# Altium PCB LAY-90818_A.brd.PcbDoc (part 6 of 6)
Units mil, origin at the board's own origin, x right, y up, seen from the top; angles counter-clockwise.
Board outline 4645.67 x 2165.35 mil, 4 copper layers (TOP, GND, POWER, BOTTOM), stack 60.45 mil thick; 414 components, 348 nets, 1441 pads, 720 vias.
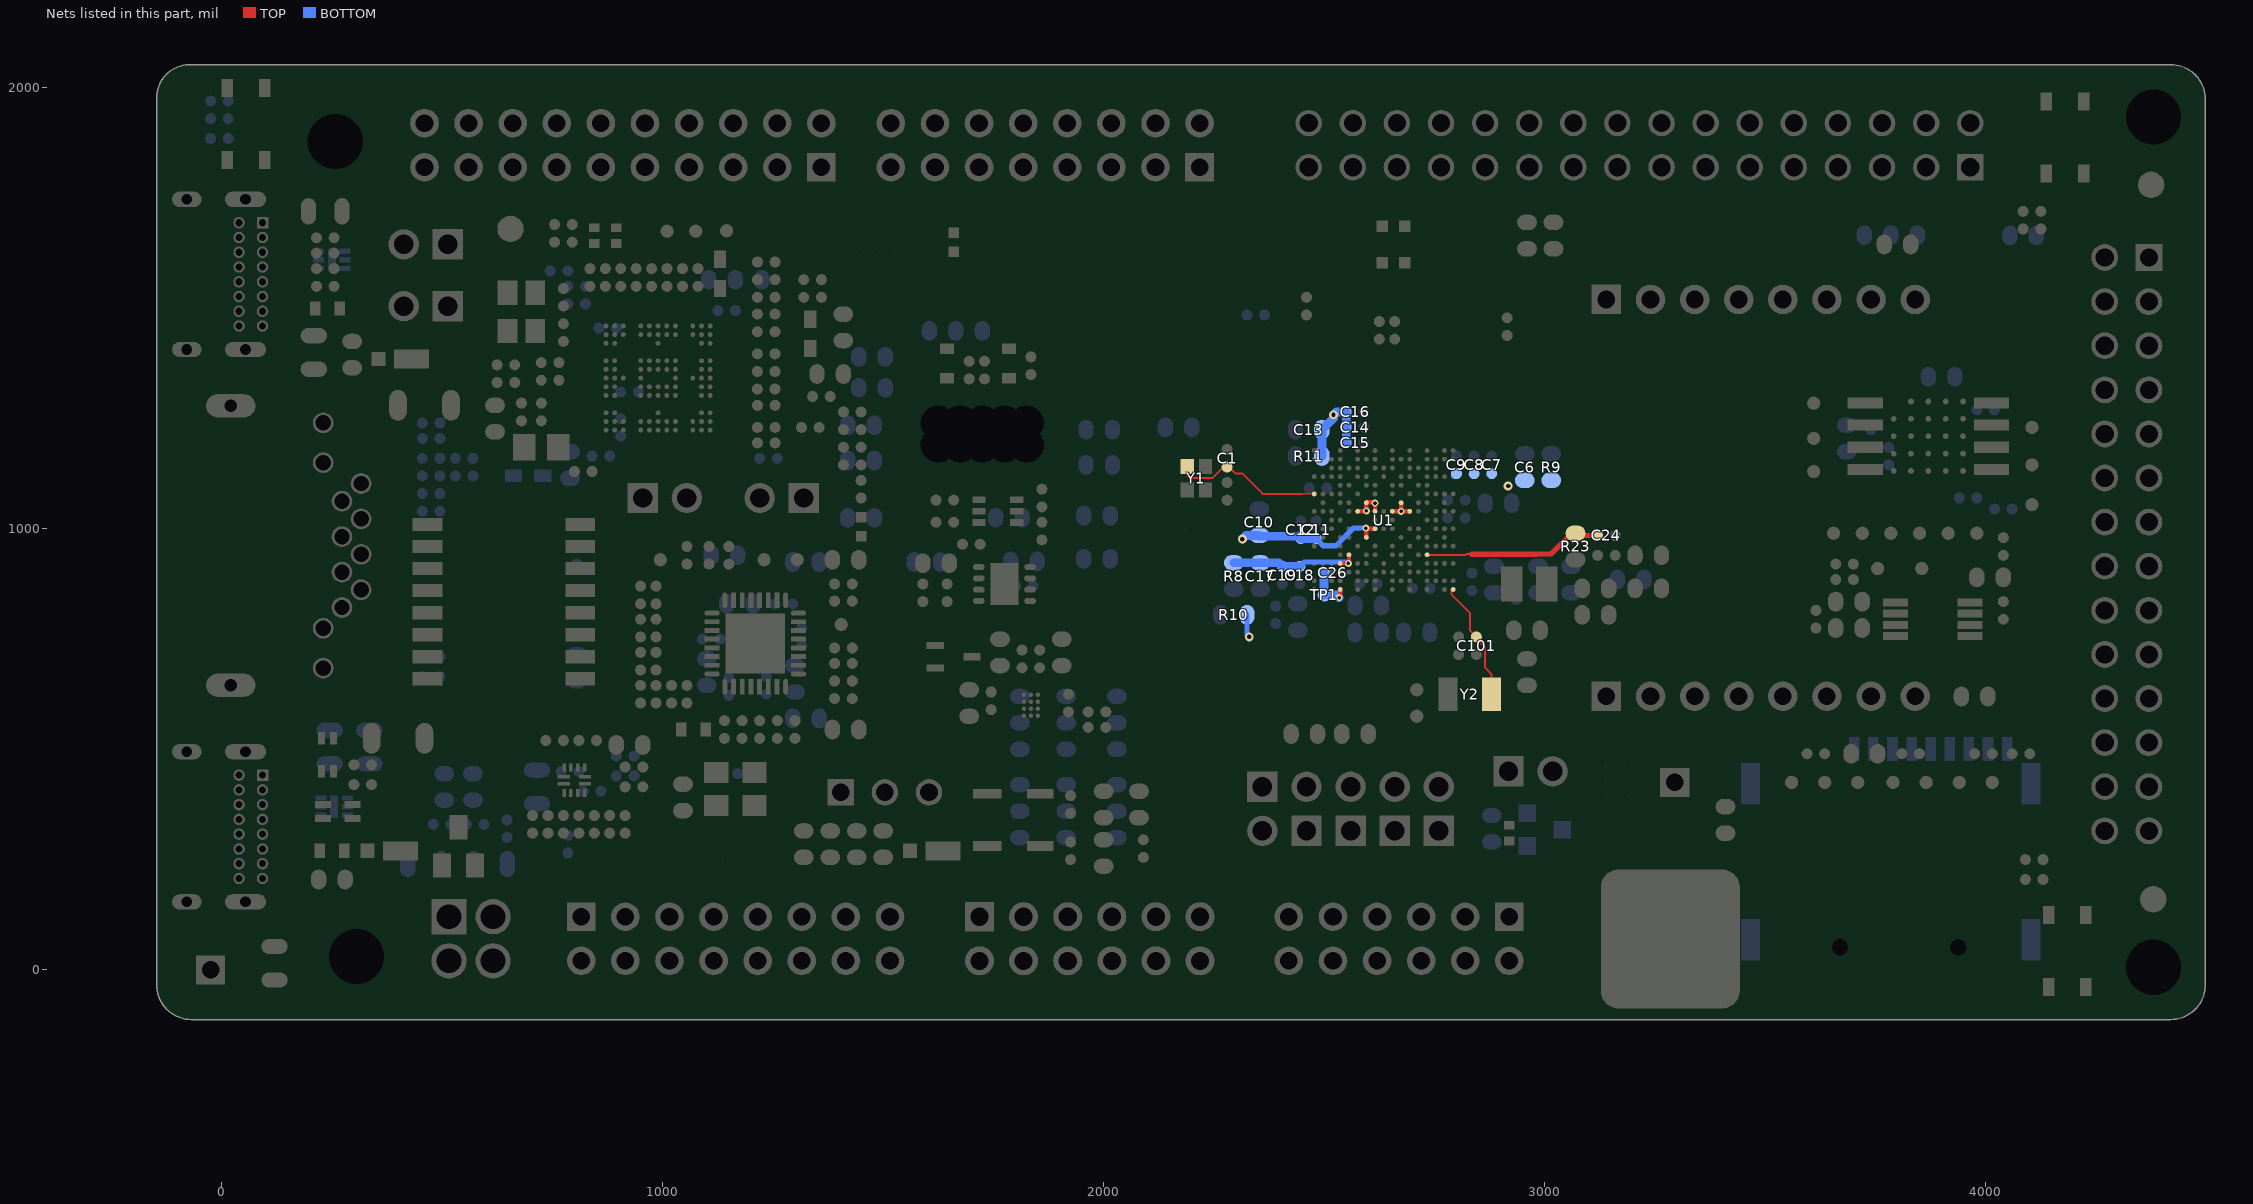
[diagram p8: the nets of this part, all layers, seen from the top]

## Via types
v1: diameter 20, hole 10, TOP to BOTTOM, 483 vias
v2: diameter 16, hole 8, TOP to BOTTOM, 215 vias
v3: diameter 18, hole 8, TOP to BOTTOM, 13 vias
v4: diameter 20, hole 10.1, TOP to BOTTOM, 9 vias

## Nets (pads, with @x,y where several pads share a name; then routed paths per layer and width w, separated by ;. In a path a pad name is that pad's centre, name@x,y a point inside that pad or via, vN(x,y) a via of type N, cw(c..) or ccw(c..) an arc to the next point about the centre after c; other vN are vias at no path point) (continued)
VDD_P0/1: C13.1 C14.1 C15.1 C16.1 R11.2 U1.G7 U1.H6 U1.H8 | length 283.9
  TOP w10: U1.H6@2575.94,1039.69 2590.32,1039.69 2591.5,1040.87 v2(2595.63,1040.87) U1.G7@2595.63,1059.37 2596.26,1060 2613.5,1060 v2(2615.31,1058.19) U1.H8@2615.31,1039.69
  BOTTOM w20: R11.2@2495,1165 C13.1@2495,1225 2521.16,1251.16 v1(2521.16,1258.79) 2527.37,1265 C16.1@2550,1265 C14.1@2550,1230 C15.1@2550,1195
VDD_P2: C10.1 C11.1 C12.1 R10.2 U1.K8 U1.L7 | length 405.2
  TOP w10: U1.L7@2595.63,980.63 2595.63,1000.59 v2(2594.38,1001.84) 2595.79,1001.84 2597.32,1000.31 U1.K8@2615.31,1000.31
  BOTTOM w12: R10.2@2325,805 2325,760 v1(2330,755) ; C11.1@2482,978 2498.62,961.38 2526.38,961.38 2566.84,1001.84 v2(2594.38,1001.84)
  BOTTOM w20: v1(2314.49,976.8) 2322.69,985 C10.1@2353,985 2354.97,983.03 2441.97,983.03 C12.1@2447,978 C11.1@2482,978
VDD_P3: C6.1 C7.1 C8.1 C9.1 R9.2 U1.G11 U1.H10 U1.H12 | length 59.2
  TOP w10: U1.H10@2654.69,1039.69 v2(2674.69,1039.69) ; U1.G11@2674.37,1059.37 2674.37,1040.01 v2(2674.69,1039.69) ; U1.H12@2694.06,1039.69 v2(2674.69,1039.69)
  other v1: 2917.16,1097.2
VDD_P4: C17.1 C18.1 C19.1 R8.2 U1.N5 U1.P4 | length 307.6
  TOP w10: U1.P4@2536.57,921.57 v2(2555.07,921.57) 2556.26,922.76 U1.N5@2556.26,941.26
  BOTTOM w12: C18.1@2445,915 2455,925 2551.64,925 v2(2555.07,921.57)
  BOTTOM w20: R8.2@2295,923 C17.1@2355,923 2397,923 C19.1@2405,915 C18.1@2445,915
VDD_SYS: C24.1 R23.2 U1.N14 | length 409.4
  TOP w4: U1.N14@2733.43,941.26 2734.12,940.57 2820.58,940.57 2822.51,942.5
  TOP w4.4: 2822.51,942.5 2835,942.5
  TOP w12: 2835,942.5 2982.5,942.5 2983.1,943.1 3014.61,943.1 3061.51,990 R23.2@3070,990 3075,985 C24.1@3120,985
VREFO: C26.1 TP1.1 U1.U4 | length 105.6
  TOP w10: v2(2533.8,844.23) 2536.57,847 U1.U4@2536.57,862.52
  BOTTOM w20: C26.1@2500,900 TP1.1@2500,850 2528.03,850 v2(2533.8,844.23)
XTAL: C1.1 U1.F1 Y1.1 | length 347.4
  TOP w4: 2449.15,1079.37 2477.21,1079.37 U1.F1@2477.52,1079.06
  TOP w4.4: Y1.1@2189.33,1141.58 2189.33,1120 2194.33,1115 2246.28,1115 2271.28,1140 C1.1@2280,1140 2285,1140 2300,1125 2315,1125 2360.63,1079.37 2449.15,1079.37
XTAL32K: C101.1 U1.U17 Y2.1 | length 276.7
  TOP w4.4: U1.U17@2792.48,862.52 2788.52,858.56 2788.52,851.48 2830.43,809.57 2830.43,769.57 C101.1@2845,755 2845,750 2865,730 2865,685 2879.21,670.79 Y2.1@2879.21,625
pads on no net: J2.19 J6.A8 J6.B8 J7. J17.A8 J17.B8 MH1.1 MH2.1 MH3.1 MH4.1 T1.4 T1.5 T1.12 T1.13 U2.3 U4.3 U4.4 U4.5 U7.A2 U7.A5 U7.B1 U7.B5 U9.4 U11.A1 U11.A2 U11.A6 U11.B3 U11.B7 U11.B8 U11.C1 U11.C2 U11.C7 U11.C12 U11.E1 U11.E5 U11.E13 U11.F6 U11.F13 U11.G3 U11.G5 U11.G6 U11.G8 U11.G9 U11.G11 U11.H6 U11.H8 U11.H13 U11.J1 U11.J2 U11.J5 U11.J7 U11.J8 U11.J9 U11.J12 U11.L2 U11.L7 U11.M2 U11.M7 U11.M8 U12.3 U12.4 U12.5

## Polygon pours and split planes (outlines as drawn)
MCU_LINK_3V3 on BOTTOM "BOTTOM-MCU_LINK_3V3" (solid, pour order 46): 1160,1525 1160,1200 1175,1200 1180,1195 1224.7,1195 1234.7,1205 1234.7,1241.9 1234.7,1299.7 1245,1310 1310,1310 1330,1330 1330,1530 1325,1535 1170,1535
VDD_IO_USB on BOTTOM "BOTTOM-VDD_IO_USB" (solid, pour order 41): 2675,510 2675,490 2610,425 2610,390 2595,375 2530,375 2520,385 2520,445 2370,595 2370,665 2375,670 2405,670 2550,525 2660,525
EPHY_VDDA on BOTTOM "BOTTOM-EPHY_VDDA" (solid, pour order 44): 790,675 845,675 863,657 863,619 877,605 900,605 995,700 995,785 1005,795 1070,795 1080,785 1080,769 1067,756 1067,678 1082,663 1117,663 1131,649 1131,590 1125,584 1014,584 975,545 805,545 780,570 780,665
N18262974 on BOTTOM "BOTTOM-N18262974" (solid, pour order 37): 270,565 -100,565 -110,555 -110,485 -100,475 90,475 140,525 275,525 275,560
P3V3 on BOTTOM "BOTTOM-P3V3" (solid, pour order 57): 775,160 775,75 795,55 1145,55 1165,35 1165,-50 1145,-70 705,-70 680,-45 680,280 690,290 775,290 800,265 800,185
P5-9V_VIN on BOTTOM "BOTTOM-P5-9V_VIN" (solid, pour order 55): 1365,430 1365,-10 1370,-15 1530,-15 1550,5 1550,215 1460,305 1460,430
MCU_LINK_VBAT on BOTTOM "BOTTOM-MCU_LINK_VBAT" (solid, pour order 26): 710,1135 855,1135 865,1145 865,1215 870,1220 920,1220 925,1215 925,1100 915,1090 715,1090 710,1095
P5V0 on BOTTOM "BOTTOM-P5V0" (solid, pour order 43): 1630,600 1705,600 1720,585 1720,285 1635,200 1560,200 1560,260 1630,330
VDD_P3 on BOTTOM "BOTTOM-VDD_P3" (solid, pour order 15): 2790,1135 2925,1135 2930,1130 3035,1130 3040,1125 3040,1090 3035,1085 2915,1085 2895,1105 2790,1105 2785,1110 2785,1130
P5V0_MCU_LINK_USB on BOTTOM "BOTTOM-P5V0_MCU_LINK_USB" (solid, pour order 25): 25,1480 113,1480 123,1470 280,1470 295,1485 295,1595 270,1595 270,1535 260,1525 120,1525 105,1510 25,1510 20,1505 20,1485
GND on BOTTOM "BOTTOM-GND" (solid, pour order 14): 2790,1155 2970,1155 2980,1165 2980,1205 2975,1210 2885,1210 2860,1185 2795,1185 2785,1175 2785,1160
GND_ENET on BOTTOM "BOTTOM-GND_ENET" (solid, pour order 23): 450,535 450,610 440,620 310,620 300,610 300,535 310,525 440,525
GND on BOTTOM "BOTTOM-GND 1" (solid, pour order 13): 755,1230 850,1230 855,1225 855,1160 850,1155 755,1155 750,1160 750,1225
GND on BOTTOM "BOTTOM-GND 2" (solid, pour order 32): 285,485 220,485 205,500 190,515 155,515 150,510 150,490 150,410 165,395 190,395 200,405 285,405 355,405 365,415 365,475 355,485
P3V3 on BOTTOM "BOTTOM-P3V3 1" (solid, pour order 1): 599,1090 676,1090 680,1094 680,1146 676,1150 599,1150 595,1146 595,1094
GND on TOP "TOP-GND" (solid, pour order 12): 444,485 536,485 540,489 540,556 536,560 444,560 440,556 440,489
P5V0 on TOP "TOP-P5V0" (solid, pour order 39): 1600,295 1885,295 1915,265 1965,265 1975,255 2013,255 2023,245 2023,224 2014,215 1605,215 1595,225 1595,290
N18292445 on TOP "TOP-N18292445" (solid, pour order 9): 877,1276 858.8,1276 839.7,1256.9 799.7,1256.9 769.7,1226.9 759.7,1216.9 734.7,1216.9 729.7,1211.9 729.7,1160 734.7,1155 795,1155 799.7,1159.7 799.7,1206.9 829.7,1236.9 839.7,1236.9 839.9,1237.1 844.2,1237.1 864,1256.9 877.6,1256.9 879.7,1259 879.7,1273.3
GND on TOP "TOP-GND 1" (solid, pour order 6): 164,1379 301,1379 311,1379 317,1373 317,1348 314,1345 305,1345 301,1341 155,1341 150,1346 150,1365
P5V0 on TOP "TOP-P5V0 1" (solid, pour order 45): 340,185 340,-30 360,-50 525,-50 545,-30 545,50 530,65 465,65 445,85 445,290 440,295 370,295 365,290 365,210 350,195
P5V_USB_HS on TOP "TOP-P5V_USB_HS" (solid, pour order 20): 275,325 345,325 350,320 350,210 320,180 270,180 265,185 265,315
P5V0_MCU_LINK_USB on TOP "TOP-P5V0_MCU_LINK_USB" (solid, pour order 0): 165,1470 220,1470 225,1475 225,1516 221,1520 164,1520 160,1516 160,1475
GND on TOP "TOP-GND 2" (solid, pour order 8): 570,1315 670,1315 685,1300 735,1300 738,1297 738,1279 732,1273 567,1273 560,1280 560,1305
GND_ENET on TOP "TOP-GND_ENET" (solid, pour order 5): 349,1240 416,1240 420,1244 420,1316 416,1320 349,1320 345,1316 345,1244
GND_ENET on TOP "TOP-GND_ENET 1" (solid, pour order 30): 95,630 360,630 365,625 365,590 360,585 360,575 360,535 360,495 355,490 295,490 290,495 290,570 270,590 95,590
P3V3 on TOP "TOP-P3V3" (solid, pour order 54): 2055,360 2115,360 2130,375 2130,505 2155,530 2380,530 2395,515 2395,385 2390,380 2330,380 2305,355 2305,305 2285,285 2050,285 2045,290 2045,350
N18256242 on TOP "TOP-N18256242" (solid, pour order 53): -105,1780 205,1780 215,1770 215,1715 215,1695 210,1690 185,1690 160,1715 -50,1715 -70,1695 -70,1455 -40,1425 145,1425 175,1455 237,1455 243,1449 243,1426 237,1420 191,1420 141,1370 -115,1370 -125,1380 -125,1770 -115,1780
DCDC_VDD_CORE on TOP "TOP-DCDC_VDD_CORE" (solid, pour order 18): 2980,915 2980,840 2985,835 3045,835 3055,825 3060,820 3060,800 3075,785 3095,785 3105,795 3105,890 3095,900 3050,900 3030,920 2985,920
DCDC_LX on TOP "TOP-DCDC_LX" (solid, pour order 16): 2790,930 2820,930 2830,920 2850,920 2945,920 2950,915 2950,840 2945,835 2870,835 2785,920 2785,925
N17976562 on TOP "TOP-N17976562" (solid, pour order 21): 2405,555 2405,390 2420,375 2480,375 2495,390 2495,455 2445,505 2445,555 2440,560 2410,560
P3V3_MCU on TOP "TOP-P3V3_MCU" (solid, pour order 58): 2475,560 2550,560 2555,555 2555,520 2585,490 2800,490 2805,485 2805,270 2750,215 2600,215 2535,280 2335,280 2325,290 2325,345 2335,355 2485,355 2505,375 2505,460 2465,500 2465,550
N18292448 on TOP "TOP-N18292448" (solid, pour order 28): 894.9,1308 845.8,1308 829.7,1291.9 771.9,1291.9 740,1260 665,1260 645,1240 604.7,1240 594.7,1230 594.7,1160 595,1160 600,1155 704.7,1155 709.7,1160 709.7,1215.7 720.9,1226.9 749.7,1226.9 759.7,1236.9 789.7,1266.9 834.7,1266.9 852.8,1285 887.8,1285 897,1294.2 897,1305.9
P5-9V_VIN on TOP "TOP-P5-9V_VIN" (solid, pour order 33): 1350,450 1453,450 1460,443 1460,305 1451,296 1306,296 1297,305 1297,322 1340,365 1340,440
N18262974 on TOP "TOP-N18262974" (solid, pour order 48): -115,535 115,535 130,520 130,485 120,475 -60,475 -80,455 -80,180 -70,170 155,170 165,160 165,110 165,45 155,35 95,35 90,40 90,100 80,110 -110,110 -125,125 -125,525
P5V_MCU_LINK_USB on TOP "TOP-P5V_MCU_LINK_USB" (solid, pour order 24): 260,1515 260,1410 265,1405 323,1405 329,1399 329,1369 333,1365 377.5,1365 377.5,1480.5 343,1515
P5V_HDR_IN on TOP "TOP-P5V_HDR_IN" (solid, pour order 38): 1475,435 1475,301 1479,297 1531,297 1538,290 1538,260 1543,255 1570,255 1580,265 1580,310 1588.5,318.5 1645.5,318.5 1657,330 1657,443 1650,450 1635,450 1490,450
USB_OTG_VBUS_5V on TOP "TOP-USB_OTG_VBUS_5V" (solid, pour order 10): 230,300 135,300 120,285 120,230 125,225 170,225 190,245 230,245 235,250 235,295
GND on TOP "TOP-GND 3" (solid, pour order 3): 80,-5 155,-5 160,-10 160,-70 155,-75 85,-75 75,-65 75,-10
GND on TOP "TOP-GND 4" (solid, pour order 11): 265,1690 330,1690 340,1700 340,1770 330,1780 265,1780 255,1770 255,1700
P5V0 on TOP "TOP-P5V0 2" (solid, pour order 19): 434,1360 551,1360 555,1364 555,1426 551,1430 434,1430 395,1430 390,1425 390,1365 395,1360
GND_ENET on TOP "TOP-GND_ENET 2" (solid, pour order 17): 285,1275 320,1240 350,1240 360,1250 360,1320 90,1320 85,1315 85,1295 90,1290 270,1290
P3V3 on TOP "TOP-P3V3 1" (solid, pour order 2): 1319.7,1461.9 1319.7,1456.9 1329.7,1446.9 1379.7,1446.9 1384.7,1451.9 1384.7,1461.9 1389.7,1466.9 1424.7,1466.9 1429.7,1471.9 1429.7,1501.9 1424.7,1506.9 1414.7,1506.9 1334.7,1506.9 1319.7,1491.9
MCU_LINK_3V3 on TOP "TOP-MCU_LINK_3V3" (solid, pour order 4): 1359.7,1386.9 1359.7,1326.9 1354.7,1321.9 1309.7,1321.9 1304.7,1326.9 1304.7,1386.9 1304.7,1416.9 1319.7,1431.9 1354.7,1431.9 1359.7,1426.9
GND on TOP "TOP-GND 5" (solid, pour order 35): 1712,372 1948,372 1960,360 2020,360 2031,349 2031,286 2020,275 1920,275 1890,305 1708,305 1703,310 1703,363
VDD_IO_USB on TOP "TOP-VDD_IO_USB" (solid, pour order 7): 2585,550 2585,505 2605,485 2670,485 2675,490 2675,545 2660,560 2595,560
GND on TOP "TOP-GND 6" (solid, pour order 29): 1255,270 1255,205 1525,205 1525,270
LDO_3V3 on TOP "TOP-LDO_3V3" (solid, pour order 31): 1835,450 2035,450 2095,450 2105,440 2105,390 2100,385 1825,385 1825,440
GND on POWER "POWER-GND" (solid, pour order 49): 115,465 295,465 305,455 305,205 290,190 130,190 115,205
VDD_P3 on POWER "POWER-VDD_P3" (solid, pour order 34): 2645,1050 2645,1015 2658,1002 2747,1002 2795,1050 2930,1050 2940,1060 2940,1105 2925,1120 2715,1120
N18566301 on POWER "POWER-N18566301" (solid, pour order 59): 2646,371 2786,371 2905,490 2905,616 2919,630 3074,630 3086,618 3086,374 2967,255 2655,255 2625,285 2625,350
VDD_CORE on POWER "POWER-VDD_CORE" (solid, pour order 47): 2655,995 2750,995 2795,1040 2960,1040 2970,1030 2970,965 3000,935 3125,935 3135,925 3135,880 3120,865 2938,865 2878,925 2756,925 2723,892 2705,892 2678,919 2671,919 2667,923 2645,945 2645,985
USB_OTG_VBUS_5V on POWER "POWER-USB_OTG_VBUS_5V" (solid, pour order 40): -15,425 85,425 85,310 101,294 185,294 195,284 195,225 190,220 -15,220 -30,235 -30,410
P3V3 on POWER "POWER-P3V3" (solid, pour order 63): 3397.5,-82.5 3385,-70 2030,-70 2015,-55 2015,230 1990,255 610,255 595,270 595,1295 610,1310 920,1310 940,1330 940,1555 910,1585 845,1585 820,1610 635,1610 505,1740 375,1740 330,1785 -7,1785 -17,1795 -17,2025 -7,2035 4160,2035 4445,1750 4445,220 4142.5,-82.5
VDD_DCDC on POWER "POWER-VDD_DCDC" (solid, pour order 22): 2770,890 2850,890 2950,790 2980,790 3010,820 3010,845 3000,855 2950,855 2865,940 2785,940 2765,920 2765,895
VDD_P2 on POWER "POWER-VDD_P2" (solid, pour order 42): 2290,995 2290,755 2300,745 2345,745 2375,775 2495,775 2500,780 2500,830 2360,970 2330,1000 2295,1000
VDD_IO_USB on POWER "POWER-VDD_IO_USB" (solid, pour order 60): 2377.5,1197.5 2375,1195 2375,1005 2603,777 2603,663 2525,585 2525,385 2530,380 2595,380 2615,400 2615,441 2705,531 2705,884 2677,912 2668,912 2570,1010 2549,1010 2490,1069 2490,1090 2490,1265 2510,1285 2545,1285 2650,1180 2960,1180 3020,1120 3035,1120 3070,1155 3070,1310 3030,1350 2425,1350 2377.5,1302.5
MCU_LINK_3V3 on POWER "POWER-MCU_LINK_3V3" (solid, pour order 27): 900,1495 890,1495 880,1485 880,1475 935,1420 935,1360 922,1347 807,1347 805,1345 805,1325 810,1320 930,1320 960,1350 960,1425 970,1435 1110,1435 1130,1415 1175,1415 1185,1425 1185,1440 1175,1450 1145,1450 1130,1465 930,1465
GND on POWER "POWER-GND 1" (solid, pour order 61): -5,1775 320,1775 365,1730 500,1730 630,1600 820,1600 845,1575 900,1575 925,1550 925,1365 915,1355 800,1355 770,1325 640,1325 545,1420 305,1420 285,1400 285,1360 275,1350 210,1350 0,1350 -20,1370 -20,1760
VDD_BAT on POWER "POWER-VDD_BAT" (solid, pour order 52): 2862,883 2738,883 2715,860 2715,525 2625,435 2625,397 2640,382 2693,382 2704,393 2704,429 2810,535 2810,695 2900,785 2900,845
VDD_CORE_SYS on POWER "POWER-VDD_CORE_SYS" (solid, pour order 56): 2736,381 2781,381 2895,495 2895,630 2911,646 3041,646 3195,800 3195,830 3185,840 3045,840 2985,780 2905,780 2815,690 2815,525 2726,436 2726,391
P5V0 on POWER "POWER-P5V0" (solid, pour order 62): 570,260 570,530 520,580 520,1095 553,1128 553,1397 535,1415 447,1415 315,1415 300,1400 300,1125 300,800 270,770 270,580 330,520 330,-20 350,-40 385,-75 1585,-75 1980,-75 2000,-55 2000,225 1985,240 590,240
N17976562 on POWER "POWER-N17976562" (solid, pour order 51): 2375,750 2375,517 2425,467 2425,396 2441,380 2500,380 2510,390 2510,590 2593,673 2593,745 2573,765 2390,765
VDD_P0/1 on POWER "POWER-VDD_P0/1" (solid, pour order 36): 2625,1050 2610,1035 2560,1035 2500,1095 2500,1275 2540,1275 2625,1190 2640,1175 2640,1118 2625,1103
VDD_LDO_CORE_IN on POWER "POWER-VDD_LDO_CORE_IN" (solid, pour order 50): 2575,1030 2605,1030 2645,1070 2645,1095 2720,1170 2955,1170 3030,1095 3030,1010 3045,995 3170,995 3275,890 3275,820 3265,810 3210,810 3205,815 3205,835 3190,850 3160,850 3140,870 3140,925 3125,940 3000,940 2975,965 2975,1080 2930,1125 2745,1125 2660,1040 2660,1010 2640,990 2595,990 2570,1015 2570,1025
GND on GND "GND-GND" (solid, pour order 64): 4301.38,2032.68 cw(c4301.38,1973.94) 4360.12,1973.94 4360.12,-33.94 cw(c4301.38,-33.94) 4301.38,-92.68 -68.7,-92.68 cw(c-68.7,-33.94) -127.44,-33.94 -127.44,630 160,630 162.5,632.5 302.5,632.5 320,650 320,815 345,840 345,1295 340,1300 180,1300 -122.44,1300 -127.44,1305 -127.44,1977.24 cw(c-71.94,1977.24) -74.72,2032.68

## Keep-outs
TOP:
  region: 720,1680 ccw(c655,1680) 655,1745 655,1723 656,1723 656,1710 cw(c656,1681) 685,1681 685,1680 cw(c655,1680) 655,1710 655,1722 654,1722 654,1745 ccw(c654.99,1680)
  region: 4445,160 ccw(c4380,160) 4380,225 4380,203 4381,203 4381,191 cw(c4379.98,161) 4410,161 4410,160 cw(c4380,160.98) 4380,191 4380,202 4379,202 4379,225 ccw(c4379.99,160)
  region: 4440,1780 ccw(c4375,1780) 4375,1845 4375,1823 4376,1823 4376,1810 cw(c4376.98,1781) 4406,1781 4406,1780 cw(c4375,1778.98) 4375,1810 4375,1822 4374,1822 4374,1845 ccw(c4374.99,1780)
Multi-Layer:
  region: 198.38,698.62 cw(c127.33,698.64) 63.88,666.65 -167.44,666.65 -167.44,1257.84 63.65,1257.84 cw(c127.57,1226.7) 198.38,1233.2
  region: 525,1051 525,585 530,580 740,580 745,585 745,1070 740,1075 549,1075

## Other copper
TOP:
  region net GND: 173.89,1554.16 173.34,1556.92 171.78,1559.25 169.44,1560.82 166.68,1561.37 163.92,1560.82 163.14,1560.29 161.58,1559.25 160.02,1556.92 159.47,1554.16 160.02,1551.4 161.58,1549.06 163.14,1548.02 163.92,1547.5 166.68,1546.95 169.44,1547.5 171.78,1549.06 173.34,1551.4 173.89,1554.16
  region net GND: 892.21,665 891.66,667.76 890.1,670.1 887.76,671.66 885,672.21 882.24,671.66 881.46,671.14 879.9,670.1 878.34,667.76 877.79,665 878.34,662.24 879.9,659.9 881.46,658.86 882.24,658.34 885,657.79 887.76,658.34 890.1,659.9 891.66,662.24 892.21,665
  region net GND: 892.21,1000 891.66,1002.76 890.1,1005.1 887.76,1006.66 885,1007.21 882.24,1006.66 881.46,1006.14 879.9,1005.1 878.34,1002.76 877.79,1000 878.34,997.24 879.9,994.9 881.46,993.86 882.24,993.34 885,992.79 887.76,993.34 890.1,994.9 891.66,997.24 892.21,1000
  region net GND: 173.89,1646.16 173.34,1648.92 171.78,1651.25 169.44,1652.82 166.68,1653.37 163.92,1652.82 163.14,1652.29 161.58,1651.25 160.02,1648.92 159.47,1646.16 160.02,1643.4 161.58,1641.06 163.14,1640.02 163.92,1639.5 166.68,1638.95 169.44,1639.5 171.78,1641.06 173.34,1643.4 173.89,1646.16
  region net GND: 422.21,800 421.66,802.76 420.1,805.1 417.76,806.66 415,807.21 412.24,806.66 411.46,806.14 409.9,805.1 408.34,802.76 407.79,800 408.34,797.24 409.9,794.9 411.46,793.86 412.24,793.34 415,792.79 417.76,793.34 420.1,794.9 421.66,797.24 422.21,800
  region net GND: 183.89,314.16 183.34,316.92 181.78,319.25 179.44,320.82 176.68,321.37 173.92,320.82 173.14,320.29 171.58,319.25 170.02,316.92 169.47,314.16 170.02,311.4 171.58,309.06 173.14,308.02 173.92,307.5 176.68,306.95 179.44,307.5 181.78,309.06 183.34,311.4 183.89,314.16
  region net GND: 422.21,890 421.66,892.76 420.1,895.1 417.76,896.66 415,897.21 412.24,896.66 411.46,896.14 409.9,895.1 408.34,892.76 407.79,890 408.34,887.24 409.9,884.9 411.46,883.86 412.24,883.34 415,882.79 417.76,883.34 420.1,884.9 421.66,887.24 422.21,890
  region net GND: 892.21,915 891.66,917.76 890.1,920.1 887.76,921.66 885,922.21 882.24,921.66 881.46,921.14 879.9,920.1 878.34,917.76 877.79,915 878.34,912.24 879.9,909.9 881.46,908.86 882.24,908.34 885,907.79 887.76,908.34 890.1,909.9 891.66,912.24 892.21,915
  region net GND: 422.21,1025 421.66,1027.76 420.1,1030.1 417.76,1031.66 415,1032.21 412.24,1031.66 411.46,1031.14 409.9,1030.1 408.34,1027.76 407.79,1025 408.34,1022.24 409.9,1019.9 411.46,1018.86 412.24,1018.34 415,1017.79 417.76,1018.34 420.1,1019.9 421.66,1022.24 422.21,1025
  region net GND: 892.21,745 891.66,747.76 890.1,750.1 887.76,751.66 885,752.21 882.24,751.66 881.46,751.14 879.9,750.1 878.34,747.76 877.79,745 878.34,742.24 879.9,739.9 881.46,738.86 882.24,738.34 885,737.79 887.76,738.34 890.1,739.9 891.66,742.24 892.21,745
  region net GND: 892.21,625 891.66,627.76 890.1,630.1 887.76,631.66 885,632.21 882.24,631.66 881.46,631.14 879.9,630.1 878.34,627.76 877.79,625 878.34,622.24 879.9,619.9 881.46,618.86 882.24,618.34 885,617.79 887.76,618.34 890.1,619.9 891.66,622.24 892.21,625
  text "04" at 3689,-1511 h60
  text "L1_PS" at 4239,-1511 h60
GND:
  text "L2_GND" at 4245,-1505 h60
  text "05" at 3720,-1520 h60
POWER:
  text "L3_POWER" at 4220,-1510 h60
  text "06" at 3710,-1515 h60
BOTTOM:
  text "170-90818 REV A" at 3460,-70 h25
  text "07" at 3694,-1511 h60
  text "L4_SS" at 4234,-1511 h60

## Silkscreen, mask and mechanical layers (free items; w line width, h text height)
Top Overlay:
  circle w8: c1900,1626 r39
  circle w8: c1900,1626 r39
  lines w6: -50,1360 -50,1325 15,1325 ; -44,1779 -44,1790 29,1790 325,1790 325,1720 590,1720 ; -20,1325 560,1325 560,1120 775,1120 775,1105 860,1105 860,995 955,995 ; 730,1715 1385,1715 ; 1120,230 1120,325 1265,325 1265,495 ; 1120,570 1120,495 1330,495 1330,595 1320,595 ; 1145,995 1400,995 1400,960 1480,960 1480,980 ; 1175,595 1275,595 ; 1365,650 1365,585 1565,585 1565,845 1465,845 1465,895 1365,895 1365,840 ; 1365,690 1365,780 ; 1380,1715 1495,1715 1495,1040 ; 1385,180 1385,230 925,230 925,180 1475,180 ; 2864.96,1049.89 2904.96,1049.89 ; 2930,1695 2920,1695 2920,1750 2920,2040 3815,2040 3815,1695 3050,1695 ; 2944.96,1009.89 2904.96,1009.89 ; 2944.96,1089.89 2904.96,1089.89 2949.96,1089.89 ; 2944.96,1169.89 2904.96,1169.89 ; 2904.96,1009.89 2904.96,1169.89 ; 2904.96,1009.89 2949.96,1009.89 ; 2904.96,1169.89 2949.96,1169.89 ; 2949.96,1009.89 cw(c2944.96,1009.89) 2944.96,1004.89 cw(c2944.96,1009.89) 2939.96,1009.89 cw(c2944.96,1009.89) 2944.96,1014.89 cw(c2944.96,1009.89) 2949.96,1009.89 ; 2949.96,1089.89 cw(c2944.96,1089.89) 2944.96,1084.89 cw(c2944.96,1089.89) 2939.96,1089.89 cw(c2944.96,1089.89) 2944.96,1094.89 cw(c2944.96,1089.89) 2949.96,1089.89 ; 2949.96,1169.89 cw(c2944.96,1169.89) 2944.96,1164.89 cw(c2944.96,1169.89) 2939.96,1169.89 cw(c2944.96,1169.89) 2944.96,1174.89 cw(c2944.96,1169.89) 2949.96,1169.89 ; 2854.96,1049.89 cw(c2864.96,1049.89) 2864.96,1059.89 cw(c2864.96,1049.89) 2874.96,1049.89 cw(c2864.96,1049.89) 2864.96,1039.89 cw(c2864.96,1049.89) 2854.96,1049.89 ; 2854.96,1129.89 cw(c2864.96,1129.89) 2864.96,1139.89 cw(c2864.96,1129.89) 2874.96,1129.89 cw(c2864.96,1129.89) 2864.96,1119.89 cw(c2864.96,1129.89) 2854.96,1129.89 ; 2859.96,1049.89 cw(c2864.96,1049.89) 2864.96,1054.89 cw(c2864.96,1049.89) 2869.96,1049.89 cw(c2864.96,1049.89) 2864.96,1044.89 cw(c2864.96,1049.89) 2859.96,1049.89 ; 2859.96,1129.89 cw(c2864.96,1129.89) 2864.96,1134.89 cw(c2864.96,1129.89) 2869.96,1129.89 cw(c2864.96,1129.89) 2864.96,1124.89 cw(c2864.96,1129.89) 2859.96,1129.89 ; 2864.96,1129.89 2904.96,1129.89 2864.96,1129.89 ; 2934.96,1009.89 ccw(c2944.96,1009.89) 2944.96,999.89 ccw(c2944.96,1009.89) 2954.96,1009.89 ccw(c2944.96,1009.89) 2944.96,1019.89 ccw(c2944.96,1009.89) 2934.96,1009.89 ; 2934.96,1089.89 ccw(c2944.96,1089.89) 2944.96,1079.89 ccw(c2944.96,1089.89) 2954.96,1089.89 ccw(c2944.96,1089.89) 2944.96,1099.89 ccw(c2944.96,1089.89) 2934.96,1089.89 ; 2934.96,1169.89 ccw(c2944.96,1169.89) 2944.96,1159.89 ccw(c2944.96,1169.89) 2954.96,1169.89 ccw(c2944.96,1169.89) 2944.96,1179.89 ccw(c2944.96,1169.89) 2934.96,1169.89
  lines w8: 2920.04,542.58 ccw(c2978.62,589.28) 2977.91,514.37 ; 2922.01,1578.58 cw(c2978.58,1529.44) 2978.57,1604.37 4002.43,1604.37 ; 2977.95,514.35 3200.09,514.35 3670,514.35 ; 3780,514.35 4000.09,514.35 ; 3998.64,514.37 ccw(c3998.64,574.72) 4041.32,532.05 ; 4002.43,1604.39 cw(c4002.43,1553.18) 4038.64,1589.39 ; 4045.96,1582.07 cw(c4003.29,1539.39) 4063.64,1539.39 4063.64,1505 4063.64,975 4063.64,915 ; 4048.64,539.37 ccw(c4012.43,575.58) 4063.64,575.58 4063.64,865 ; 1915,1641 ccw(c1900,1625) 1920,1616 cw(c1900,1625) 1915,1641
Bottom Overlay:
  lines w6: 3170.04,1050.04 3170.04,1365 3485,1365 3485,1050.04 3170.04,1050.04
  lines w8: 2433,1469 ccw(c2426,1445) 2426,1470 cw(c2426,1445) 2433,1469 ; 2433,1469 ccw(c2440.2,1493.69) 2439,1468 ; 2433,1469 ccw(c2440.2,1493.69) 2439,1468 ; 2437,1427 ccw(c2413,1406.32) 2413,1438 cw(c2413,1406.32) 2437,1427 ; 2437,1427 ccw(c2460.31,1447.11) 2444,1421 ; 2437,1427 ccw(c2460.31,1447.11) 2444,1421 ; 2439,1468 ccw(c2446.5,1628.61) 2454,1468 ; 2439,1468 ccw(c2446.5,1628.61) 2454,1468 ; 2444,1421 2480,1409 ; 2444,1421 2480,1409 ; 2454,1468 ccw(c2448.71,1581.19) 2479,1472 ; 2454,1468 ccw(c2448.71,1581.19) 2479,1472 ; 2479,1472 cw(c2490.68,1429.9) 2518,1464 ; 2479,1472 cw(c2490.68,1429.9) 2518,1464 ; 2480,1409 cw(c2480,1383.98) 2505,1385 ; 2480,1409 cw(c2480,1383.98) 2505,1385 ; 2505,1385 ccw(c2510.72,1387.17) 2514,1382 ; 2505,1385 ccw(c2510.72,1387.17) 2514,1382 ; 2507,1411 cw(c2339.38,1286.21) 2514,1401 ; 2507,1411 ccw(c2482.41,1392.68) 2487,1423 cw(c2482.41,1392.68) 2507,1411 ; 2507,1411 cw(c2339.38,1286.21) 2514,1401 ; 2514,1382 2515,1384 ; 2514,1382 2515,1384 ; 2514,1401 cw(c2499.7,1391.63) 2515,1384 ; 2514,1401 cw(c2499.7,1391.63) 2515,1384 ; 2518,1464 cw(c2508.13,1451.66) 2523,1457 ; 2518,1464 cw(c2508.13,1451.66) 2523,1457 ; 2523,1425 ccw(c2530.07,1435.42) 2528,1423 ; 2523,1425 cw(c2678.46,1652.72) 2508,1436 ccw(c2678.46,1652.72) 2523,1425 ; 2523,1425 ccw(c2530.07,1435.42) 2528,1423 ; 2523,1457 ccw(c2536.58,1461.82) 2530,1449 ; 2523,1457 ccw(c2536.58,1461.82) 2530,1449 ; 2528,1423 2534,1422 ; 2528,1423 2534,1422 ; 2529,1386 ccw(c2533.5,1383.67) 2537,1380 ; 2529,1386 ccw(c2533.5,1383.67) 2537,1380 ; 2529,1386 2532,1392 ; 2529,1386 2532,1392 ; 2530,1406 cw(c2545.11,1408.17) 2531,1414 ; 2530,1406 cw(c2545.11,1408.17) 2531,1414 ; 2530,1406 2532,1392 ; 2530,1406 2532,1392 ; 2530,1449 2535,1445 ; 2530,1449 2535,1445 ; 2531,1414 ccw(c2395,1469.56) 2534,1422 ; 2531,1414 ccw(c2395,1469.56) 2534,1422 ; 2535,1445 2541,1440 ; 2535,1445 2541,1440 ; 2537,1380 ccw(c2519.86,1397) 2544,1397 ; 2537,1380 ccw(c2519.86,1397) 2544,1397 ; 2541,1440 cw(c2530.1,1426.92) 2547,1429 ; 2541,1440 cw(c2530.1,1426.92) 2547,1429 ; 2544,1397 2544,1410 ; 2544,1397 2544,1410 ; 2544,1410 2545,1418 ; 2544,1410 2545,1418 ; 2545,1418 2546,1424 ; 2545,1418 2546,1424 ; 2546,1424 2547,1428 ; 2546,1424 2547,1428 ; 2547,1428 2547,1429 ; 2547,1428 2547,1429
  lines w10: 2362,1345 2610,1345 2362,1345 ; 2362,1345 2485,1594 ; 2362,1345 2485,1594 ; 2485,1594 2611,1345 2485,1594 ; 2359,1345 2549,1467 2359,1345
CUTOUT:
  the board outline again, w1
DIMENSION:
  lines w1: -826.5,-62.5 -780,-62.5 -826.5,-62.5 ; -826.5,-62.5 -826.5,62.5 ; -826.5,-62.5 -826.5,62.5 ; -826.5,62.5 -780,62.5 -826.5,62.5 ; -685,-575 -25,0 ; -685,-575 -2720,-575 -685,-575 ; -685,-575 -25,0 ; -547.5,-62.5 -594,-62.5 -547.5,-62.5 ; -547.5,-62.5 -547.5,62.5 ; -547.5,-62.5 -547.5,62.5 ; -547.5,62.5 -594,62.5 -547.5,62.5 ; -154.52,-79.68 -25,0 ; -154.52,-79.68 -121.68,-117.38 ; -154.52,-79.68 -25,0 ; -154.52,-79.68 -121.68,-117.38 ; -147.44,2385 2.56,2410 ; -147.44,2385 2.56,2360 ; -147.44,2385 2.56,2410 ; -147.44,2385 2.56,2360 ; -147.44,2385 1161.75,2385 -147.44,2385 ; -147.07,1006.03 5,1005 ; -147.07,1006.03 -138.51,1055.29 ; -147.07,1006.03 5,1005 ; -147.07,1006.03 -138.51,1055.29 ; -138.51,1055.29 5,1005 ; -138.51,1055.29 5,1005 ; -121.68,-117.38 -25,0 ; -121.68,-117.38 -25,0 ; -87.5,-531.5 37.5,-531.5 ; -87.5,-531.5 -87.5,-485 -87.5,-531.5 ; -87.5,-531.5 37.5,-531.5 ; -87.5,-252.5 37.5,-252.5 ; -87.5,-252.5 -87.5,-299 -87.5,-252.5 ; -87.5,-252.5 37.5,-252.5 ; 2.56,2360 2.56,2410 ; 2.56,2360 2.56,2410 ; 5,1005 -830,1150 5,1005 ; 37.5,-531.5 37.5,-485 37.5,-531.5 ; 37.5,-252.5 37.5,-299 37.5,-252.5 ; 2255.5,2322.5 2302,2322.5 2255.5,2322.5 ; 2255.5,2322.5 2255.5,2447.5 ; 2255.5,2322.5 2255.5,2447.5 ; 2255.5,2447.5 2302,2447.5 2255.5,2447.5 ; 3154.5,2322.5 3108,2322.5 3154.5,2322.5 ; 3154.5,2322.5 3154.5,2447.5 ; 3154.5,2322.5 3154.5,2447.5 ; 3154.5,2447.5 3108,2447.5 3154.5,2447.5 ; 4080,765 5200,-845 ; 4080,765 5200,-845 ; 4080,765 4186.18,656.14 ; 4080,765 4145.14,627.59 ; 4080,765 4186.18,656.14 ; 4080,765 4145.14,627.59 ; 4145.14,627.59 4186.18,656.14 ; 4145.14,627.59 4186.18,656.14 ; 4348.23,2360 4498.23,2385 ; 4348.23,2360 4348.23,2410 ; 4348.23,2360 4498.23,2385 ; 4348.23,2360 4348.23,2410 ; 4348.23,2410 4498.23,2385 ; 4348.23,2410 4498.23,2385 ; 4498.23,2385 3248.25,2385 4498.23,2385 ; 5200,-845 6530,-855 5200,-845 ; 5507.5,1062.5 5632.5,1062.5 ; 5507.5,1062.5 5507.5,1109 5507.5,1062.5 ; 5507.5,1062.5 5632.5,1062.5 ; 5507.5,1837.5 5632.5,1837.5 ; 5507.5,1837.5 5507.5,1791 5507.5,1837.5 ; 5507.5,1837.5 5632.5,1837.5 ; 5545,37.32 5570,-112.68 ; 5545,37.32 5595,37.32 ; 5545,37.32 5570,-112.68 ; 5545,37.32 5595,37.32 ; 5545,1902.68 5570,2052.68 ; 5545,1902.68 5595,1902.68 ; 5545,1902.68 5570,2052.68 ; 5545,1902.68 5595,1902.68 ; 5570,-112.68 5570,-31.25 5570,-112.68 ; 5570,-112.68 5595,37.32 ; 5570,-112.68 5595,37.32 ; 5570,2052.68 5570,1931.25 5570,2052.68 ; 5570,2052.68 5595,1902.68 ; 5570,2052.68 5595,1902.68 ; 5632.5,1062.5 5632.5,1109 5632.5,1062.5 ; 5632.5,1837.5 5632.5,1791 5632.5,1837.5 ; -453.75,0 -125,0 -453.75,0 ; -147.44,2077.24 -147.44,2485 -147.44,2077.24 ; -25,-158.75 -25,-100 -25,-158.75 ; 4481.69,2052.68 5670,2052.68 4481.69,2052.68 ; 4498.23,2073.94 4498.23,2485 4498.23,2073.94 ; 4519.49,-112.68 5670,-112.68 4519.49,-112.68
NCLEGEND-1-4:
  circle w1: c11339.5,7390 r60
  circle w1: c11339.5,7640 r60
  circle w1: c11339.5,6140 r60
  circle w1: c11339.5,7140 r60
  lines w1: 10890,4265 17865,4265 ; 10890,4515 17865,4515 ; 10890,4765 17865,4765 ; 10890,5015 17865,5015 ; 10890,5265 17865,5265 ; 10890,5515 17865,5515 ; 10890,5765 17865,5765 ; 10890,6015 17865,6015 ; 10890,6265 17865,6265 ; 10890,6515 17865,6515 ; 10890,6765 17865,6765 ; 10890,7015 17865,7015 ; 10890,7265 17865,7265 ; 10890,7515 17865,7515 ; 10890,7765 17865,7765 ; 10890,8015 17865,8015 ; 10890,8265 17865,8265 ; 11789,4015 11789,8015 ; 13804,4015 13804,8015 ; 15819,4015 15819,8015 ; 17090,4015 17090,8015 ; 10890,4015 10890,8515 17865,8515 17865,4015 10890,4015 ; 11192,4270 ccw(c11192,4390) 11192,4510 11487,4510 ccw(c11487,4390) 11487,4270 11192,4270 ; 11209.61,6640 11247.66,6548.16 11339.5,6510.11 11431.34,6548.16 11469.39,6640 11431.34,6731.84 11339.5,6769.89 11247.66,6731.84 11209.61,6640 ; 11213.07,4020 ccw(c11213.07,4140) 11213.07,4260 11465.93,4260 ccw(c11465.93,4140) 11465.93,4020 11213.07,4020 ; 11262,4520 ccw(c11262,4640) 11262,4760 11417,4760 ccw(c11417,4640) 11417,4520 11262,4520 ; 11279.5,4890 11339.5,4950 11399.5,4890 11339.5,4830 11279.5,4890 ; 11279.5,5390 11309.5,5330 11369.5,5330 11399.5,5390 11369.5,5450 11309.5,5450 11279.5,5390 ; 11279.5,5580 11399.5,5580 11399.5,5700 11279.5,5700 11279.5,5580 ; 11279.5,6390 11309.5,6330 11369.5,6330 11399.5,6390 11369.5,6450 11309.5,6450 11279.5,6390 ; 11279.5,6890 11309.5,6830 11369.5,6830 11399.5,6890 11369.5,6950 11309.5,6950 11279.5,6890 ; 11299.5,5830 11299.5,5950 11379.5,5950 11379.5,5830 11299.5,5830 ; 11309.5,5020 ccw(c11309.5,5140) 11309.5,5260 11369.5,5260 ccw(c11369.5,5140) 11369.5,5020 11309.5,5020
  text "DRILL CHART: TOP to BOTTOM" at 13077.5,8327.5 h125
  text "ALL UNITS ARE IN MILS" at 13327.5,8077.5 h125
  text "FIGURE" at 11039.5,7827.5 h125
  text "FINISHED_SIZE" at 12146.5,7827.5 h125
  text "TOLERANCE_DRILL" at 14061.5,7827.5 h125
  text "PLATED" at 16154.5,7827.5 h125
  text "QTY" at 17327.5,7827.5 h125
  text "8.0" at 12646.5,7577.5 h125
  text "+0.0/-8.0" at 14361.5,7577.5 h125
  text "PLATED" at 16154.5,7577.5 h125
  text "228" at 17327.5,7577.5 h125
  text "10.0" at 12596.5,7327.5 h125
  text "+0.0/-10.0" at 14311.5,7327.5 h125
  text "PLATED" at 16154.5,7327.5 h125
  text "483" at 17327.5,7327.5 h125
  text "10.1" at 12596.5,7077.5 h125
  text "+0.0/-10.1" at 14311.5,7077.5 h125
  text "PLATED" at 16154.5,7077.5 h125
  text "9" at 17427.5,7077.5 h125
  text "16.0" at 12596.5,6827.5 h125
  text "+2.0/-2.0" at 14361.5,6827.5 h125
  text "PLATED" at 16154.5,6827.5 h125
  text "32" at 17377.5,6827.5 h125
  text "28.0" at 12596.5,6577.5 h125
  text "+2.0/-2.0" at 14361.5,6577.5 h125
  text "PLATED" at 16154.5,6577.5 h125
  text "10" at 17377.5,6577.5 h125
  text "35.0" at 12596.5,6327.5 h125
  text "+3.0/-3.0" at 14361.5,6327.5 h125
  text "PLATED" at 16154.5,6327.5 h125
  text "12" at 17377.5,6327.5 h125
  text "40.0" at 12596.5,6077.5 h125
  text "+3.0/-3.0" at 14361.5,6077.5 h125
  text "PLATED" at 16154.5,6077.5 h125
  text "85" at 17377.5,6077.5 h125
  text "41.0" at 12596.5,5827.5 h125
  text "+3.0/-3.0" at 14361.5,5827.5 h125
  text "PLATED" at 16154.5,5827.5 h125
  text "72" at 17377.5,5827.5 h125
  text "44.0" at 12596.5,5577.5 h125
  text "+2.0/-2.0" at 14361.5,5577.5 h125
  text "PLATED" at 16154.5,5577.5 h125
  text "20" at 17377.5,5577.5 h125
  text "56.0" at 12596.5,5327.5 h125
  text "+3.0/-3.0" at 14361.5,5327.5 h125
  text "PLATED" at 16154.5,5327.5 h125
  text "4" at 17427.5,5327.5 h125
  text "37.0" at 12596.5,5077.5 h125
  text "+2.0/-2.0" at 14361.5,5077.5 h125
  text "NON-PLATED" at 15954.5,5077.5 h125
  text "2" at 17427.5,5077.5 h125
  text "125.0" at 12546.5,4827.5 h125
  text "+2.0/-2.0" at 14361.5,4827.5 h125
  text "NON-PLATED" at 15954.5,4827.5 h125
  text "4" at 17427.5,4827.5 h125
  text "55.0x24.0" at 12346.5,4577.5 h125
  text "+2.0/-2.0" at 14361.5,4577.5 h125
  text "PLATED" at 16154.5,4577.5 h125
  text "4" at 17427.5,4577.5 h125
  text "83.0x24.0" at 12346.5,4327.5 h125
  text "+2.0/-2.0" at 14361.5,4327.5 h125
  text "PLATED" at 16154.5,4327.5 h125
  text "4" at 17427.5,4327.5 h125
  text "87.0x28.0" at 12346.5,4077.5 h125
  text "+2.0/-2.0" at 14361.5,4077.5 h125
  text "PLATED" at 16154.5,4077.5 h125
  text "2" at 17427.5,4077.5 h125
FABRICATION_NOTES:
  circle w8: c-2937.5,1903 r25
  circle w8: c-2937.5,1903 r25
  circle w8: c-4921,2271 r147.5
  circle w8: c-4921,2271 r147.5
  lines w1: 175,-6425 9510,-6425 ; 175,-6275 9510,-6275 ; 756,-6575 756,-5975 ; 756,-6125 9510,-6125 ; 1712,-6575 1712,-6125 ; 2518,-6575 2518,-5975 ; 3474,-6575 3474,-6125 ; 4580,-6575 4580,-6125 ; 5386,-6575 5386,-6125 ; 6342,-6575 6342,-6125 ; 7448,-6575 7448,-6125 ; 8254,-6575 8254,-6125 ; 175,-6575 9510,-6575 9510,-5975 175,-5975 175,-6575
  lines w8: -10710,-549 -10907,-869 -10514,-869 -10709,-549 ; -1667,-203 -1472,-523 -1865,-523 -1667,-199 ; -10889,1378.5 -10692,1698.5 -10889,1378.5 ; -10889,1378.5 -10496,1378.5 ; -10889,1378.5 -10496,1378.5 ; -10882.5,2784 -10685.5,3104 -10882.5,2784 ; -10882.5,2784 -10489.5,2784 ; -10882.5,2784 -10489.5,2784 ; -10496,1378.5 -10691,1698.5 -10496,1378.5 ; -10489.5,2784 -10684.5,3104 -10489.5,2784 ; 5295,-1353 5493,-1029 5295,-1353 ; 5295,-1353 5688,-1353 ; 5295,-1353 5688,-1353 ; 5688,-1353 5493,-1033 5688,-1353 ; 10366,7018 10564,7342 10366,7018 ; 10366,7018 10759,7018 ; 10366,7018 10759,7018 ; 10759,7018 10564,7338 10759,7018 ; -5021.5,2170 -4819.5,2365 -5021.5,2170 ; -3250.5,1784 -2810.5,1784 -3250.5,1784 ; -3249.5,1782 cw(c-3203.5,1870) -3249.5,1958 ccw(c-3203.5,1870) -3249.5,1782 ; -3249.5,1957 -2811.5,1957 -3249.5,1957 ; -2810.5,1783 ccw(c-2857.27,1870.5) -2810.5,1958 cw(c-2857.27,1870.5) -2810.5,1783
DXF-20230628-T:
  drawing of 370 lines, arcs and shapes, not listed
FREEDOM:
  lines w7: 591.5,349 ccw(c1092.5,350) 1092.5,-151 3291.5,-151 ccw(c3291.45,349.05) 3791.5,349 3791.5,1449 ccw(c3291.45,1448.95) 3291.5,1949 1091.5,1949 ccw(c1091.55,1448.95) 591.5,1449 591.5,349
ARDUINO:
  lines w8: 102.1,-44.4 ccw(c141.08,-44.42) 141.1,-83.4 2702.1,-83.4 2702.1,-8.4 2902.1,141.6 2902.1,1516.6 2702.1,1666.6 2701.1,1956.6 2641.1,2016.6 137.1,2016.6 ccw(c137.1,1981.6) 102.1,1981.6 102.1,-44.4
TITLE_DATA_PAGE_2:
  lines w6: 779,7989 989,8284 1169,7989 779,7989
  text "22. THIS FAB_VIAFILL.ART SHOWS LOCATIONS OF VIA-IN-PAD TO BE FILLED." at 874,8014 h125
  text "3" at 21379,-9796 h125
  text "2" at 20529,-9806 h125
  text "1/1" at 17014,-9811 h125
TITLE_DATA_PAGE_3:
  lines w6: -10236,-6036 -10026,-5741 -9846,-6036 -10236,-6036
  text "FAB SUPPLIER: DISREGARD THIS PAGE IF BACKDRILL REQUIRMENT IS NOT PROVIDED." at -7412,4298 h500
  text "CAD DESIGNER: DELETE THIS FAB PAGE IF BACKDRILL IS NOT USED ON THIS DESIGN." at -8141,2380 h500
  text "24." at -10146,-6016 h125
  text "3" at 21379,-9796 h125
  text "1/1" at 17014,-9811 h125
  text "3" at 20529,-9811 h125
BACKDRILL_INFO:
  lines w1: -10112,-7244 -2512,-7244 ; -10104,-8587 -2504,-8587 ; -10104,-8137 -2504,-8137 ; -10104,-7687 -2504,-7687 ; -7287,-9094 -7287,-6794 ; -4962,-9094 -4962,-6794 ; -10112,-9106 -10112,-6794 -2512,-6794 -2512,-9106 -10112,-9106
  text "MUST NOT CUT LAYER" at -4787,-6994 h125
  text "BACK DRILL REFERENCE" at -9937,-7019 h125
  text "MUST CUT LAYER" at -7012,-7019 h125
  text "TOP TO LAYER X" at -9944,-7542 h125
  text "LAYER X" at -7044,-7542 h125
  text "LAYER X+1" at -4794,-7542 h125
  text "TOP TO LAYER X" at -9929,-7987 h125
  text "LAYER X" at -7029,-7987 h125
  text "LAYER X+1" at -4779,-7987 h125
  text "BOTTOM TO LAYER X" at -9907,-8429 h125
  text "LAYER X" at -7007,-8429 h125
  text "LAYER X-1" at -4757,-8429 h125
  text "BOTTOM TO LAYER X" at -9912,-8914 h125
  text "LAYER X" at -7012,-8914 h125
  text "LAYER X-1" at -4762,-8914 h125
XSECTION_CHART:
  dashed: 11066.5,1870.33 11066.5,1726.33 11091.5,1726.33 11091.5,-2821.67 11066.5,-2821.67 11066.5,-2965.67 11216.5,-2965.67 11216.5,-2821.67 11191.5,-2821.67 11191.5,1726.33 11216.5,1726.33 11216.5,1870.33
  region: 10866.5,1389.53 11466.5,1389.53 11466.5,1485.53 10866.5,1485.53
  region: 10866.5,1726.33 11466.5,1726.33 11466.5,1870.33 10866.5,1870.33
  region: 10866.5,-2580.87 11466.5,-2580.87 11466.5,-2484.87 10866.5,-2484.87
  region: 10866.5,-2965.67 11466.5,-2965.67 11466.5,-2821.67 10866.5,-2821.67
  lines w1: 10866.5,-3060.07 10866.5,-2965.67 11466.5,-2965.67 11466.5,-3060.07 10866.5,-3060.07 ; 10866.5,-2821.67 10866.5,-2580.87 11466.5,-2580.87 11466.5,-2821.67 10866.5,-2821.67 ; 10866.5,-2484.87 10866.5,1389.53 11466.5,1389.53 11466.5,-2484.87 10866.5,-2484.87 ; 10866.5,1485.53 10866.5,1726.33 11466.5,1726.33 11466.5,1485.53 10866.5,1485.53 ; 10866.5,1870.33 10866.5,1964.73 11466.5,1964.73 11466.5,1870.33 10866.5,1870.33
  text "*  SURFACE - AIR 0 MIL(+0/-0)" at 11466.5,2006.39 h125
  text "1-4" at 11141.5,1995.33 h125 r90
  text "* SOLDERMASK_TOP MASK - POLYIMIDE 1.18 MIL(+0/-0)" at 11466.5,1798.06 h125
  text "L1 TOP CONDUCTOR - COPPER_PLATED 1.8 MIL(+0/-0)" at 11466.5,1631.39 h125
  text "*  DIELECTRIC - FR-4 3.01 MIL(+0/-0)" at 11466.5,1464.73 h125
  text "L2 GND PLANE - COPPER 1.2 MIL(+0/-0)" at 11466.5,1298.06 h125
  text "*  DIELECTRIC - FR-4 48.43 MIL(+0/-0)" at 11466.5,-547.67 h125
  text "L3 POWER PLANE - COPPER 1.2 MIL(+0/-0)" at 11466.5,-2651.54 h125
  text "*  DIELECTRIC - FR-4 3.01 MIL(+0/-0)" at 11466.5,-2818.2 h125
  text "L4 BOTTOM CONDUCTOR - COPPER_PLATED 1.8 MIL(+0/-0)" at 11466.5,-2988.34 h125
  text "* SOLDERMASK_BOTTOM MASK - POLYIMIDE 1.18 MIL(+0/-0)" at 11466.5,-3155 h125
  text "*  SURFACE - AIR 0 MIL(+0/-0)" at 11466.5,-3321.67 h125
  text "___________________________" at 9816.5,-3616.33 h125
  text "DESIGN CROSS SECTION CHART" at 9866.5,-3616.33 h125
  text "TOTAL THICKNESS 62.81 MIL" at 9916.5,-3841.33 h125
FILM_TITLE_BLOCK:
  lines w10: 3679,-1346 7679,-1346 ; 3679,-1046 3679,-846 7679,-846 ; 4179,-1546 4179,-1346 ; 5429,-846 5429,-546 ; 5434,-1546 5434,-1346 ; 5929,-1546 5929,-1346
  lines w20: 3679,-1546 7679,-1546 7679,-546 3679,-546 3679,-1546
  text "NAME" at 5459,-626 h40
  text "NXP SEMICONDUCTORS" at 3709,-656 h75
  text "FRDM-MCXN947" at 6252.6,-727 h63
  text "6501 WILLIAM CANNON DRIVE WEST" at 3709,-746 h40
  text "AUSTIN. TEXAS 78735 USA" at 3709,-816 h40
  text "THIS DOCUMENT CONTAINS INFORMATION" at 3769,-916 h40
  text "___ COMPANY PUBLIC" at 5559,-946 h40
  text "PROPRIETARY TO NXP AND SHALL NOT" at 3769,-996 h40
  text "BE USED FOR ENGINEERING DESIGN" at 3769,-1076 h40
  text "___ COMPANY INTERNAL" at 5559,-1106 h40
  text "X" at 5599,-1116 h63
  text "PROCUREMENT OR MANUFACTURE IN WHOLE" at 3779,-1156 h40
  text "OR IN PART WITHOUT THE CONSENT OF" at 3779,-1236 h40
  text "___ COMPANY CONFIDENTIAL" at 5559,-1271 h40
  text "NXP." at 3769,-1316 h40
  text "SHEET" at 3709,-1426 h40
  text "FILM" at 4209,-1426 h40
  text "DATE" at 5459,-1426 h40
  text "NUMBER" at 5959,-1426 h40
  text "170-90818      REV A" at 6289,-1498 h63
  text "07-07-23" at 5479,-1506 h40
  text "OF 10" at 3874,-1511 h60
PROBE_BOTTOM:
  text "1 OF 1" at 3749,-1511 h60
  text "TEST PROBE" at 4184,-1511 h60
TITLE_DATA:
  text "1" at 21379,-9796 h125
  text "1" at 20529,-9806 h125
  text "1/1" at 17014,-9811 h125
PHOTOPLOT_OUTLINE:
  lines w1: -11521,-10521 -11521,11629 22504,11629 22504,-10521 -11521,-10521
DRAWING_ORIGIN:
  lines w1: -25,0 25,0 ; 0,-25 0,25
NO_PROBE_TOP:
  dashed: 4050,180.34 cw(c3990.43,176.49) 3995.44,117 3907,117 3907,78 3810.41,78 3780.88,126.08 3750.51,78 3659.36,78 3586,164.7 3586,78 3508,78 3508,279 3579.6,279 3654,192.07 3654,279 3751.59,279 3781.12,230.92 3811.49,279 3988.92,279 cw(c3989.81,218.81) 4050,219.02
REFERENCE_ONLY:
  lines w1: 3380,765 3440,765 3380,765 ; 3380,765 3380,965 ; 3380,765 3380,965 ; 3380,965 3800,965 3380,965 ; 4080,765 3660,765 4080,765 ; 4080,765 4080,965 ; 4080,765 4080,965 ; 4080,965 4020,965 4080,965 ; 3480,765 3530,765 3480,765 ; 3570,765 3620,765 3570,765 ; 3840,965 3890,965 3840,965 ; 3930,965 3980,965 3930,965
D_SIZE_PG1:
  drawing of 2455 lines, arcs and shapes, not listed
  text "DE" at 19924,10599 h100
  text "PE" at 20674,10599 h100
  text "CAD" at 21324,10599 h100
  text "A.Z." at 21290,10390 h100
  text "K.F." at 19845,10385 h100
  text "S.D." at 20620,10385 h100
  text "A" at 14239,10369 h125
  text "07-07-23" at 18794,10369 h100
  text "ORIGINAL RELEASE" at 14594,10361 h125
  text "170-90818" at 14399,-7091 h175
  text "THIS DOCUMENT CONTAINS INFORMATION" at 13954,-7296 h63
  text "___ COMPANY PUBLIC" at 11109,-7331 h63
  text "NXP SEMICONDUCTORS" at 17141,-7376 h225
  text "PROPRIETARY TO NXP AND SHALL NOT" at 13954,-7421 h63
  text "BE USED FOR ENGINEERING DESIGN" at 13954,-7546 h63
  text "___ COMPANY INTERNAL" at 11109,-7631 h63
  text "X" at 11149,-7631 h100
  text "PROCUREMENT OR MANUFACTURE IN WHOLE" at 13954,-7671 h63
  text "OR IN PART WITHOUT THE CONSENT OF" at 13954,-7796 h63
  text "NXP." at 13954,-7921 h63
  text "___ COMPANY CONFIDENTIAL" at 11109,-7931 h63
  text "6501 WILLIAM CANNON DRIVE WEST  AUSTIN, TEXAS 78735 USA" at 16544,-7976 h94
  text "ALL PARTS, MATERIALS AND FINISHED" at 8681,-8248 h63
  text "ASSEMBLY SHALL MEET THE RoHS" at 8681,-8332 h63
  text "PRINTED WIRING BOARD" at 17690,-8359 h175
  text "COMMISSION DELEGATED DIRECTIVE (EU)" at 8681,-8416 h63
  text "2015/863 OF 31 MARCH  2015 AMENDING" at 8681,-8500 h63
  text "Aison Zhou" at 13958,-8564 h100
  text "07-07-23" at 15604,-8564 h100
  text "ANNEX II TO DIRECTIVE 2011/65/EU. A" at 8681,-8584 h63
  text "CERTIFICATE OF COMPLIANCE IS" at 8681,-8668 h63
  text "FRDM-MCXN947" at 18247,-8725 h175
  text "REQUIRED UPON REQUEST." at 8681,-8752 h63
  text "STEVEN DING" at 13958,-8984 h100
  text "07-07-23" at 15599,-8984 h100
  text "ALL PARTS, MATERIALS AND FINISHED" at 8657,-9207 h63
  text "ASSEMBLY SHALL NOT CONTAIN ANY OF" at 8657,-9291 h63
  text "LAY-90818" at 16926,-9295 h125
  text "FAB-90818" at 18895,-9320 h175
  text "THE SUBSTANCES OF VERY HIGH CONCERN" at 8657,-9375 h63
  text "KATE FAN" at 13958,-9379 h100
  text "07-07-23" at 15594,-9379 h100
  text "A" at 21369,-9396 h175
  text "(SVHC) ABOVE THE THRESHOLD VALUE PER" at 8657,-9459 h63
  text "THE CURRENT ECHA LIST OF SVHC'S AND" at 8657,-9543 h63
  text "WITH ANNEX XIV AND ANNEX XVII OF REACH" at 8657,-9622 h63
  text "DIRECTIVE 76/769/EEC. A CERTIFICATE OF" at 8657,-9706 h63
  text "COMPLIANCE IS REQUIRED UPON REQUEST." at 8657,-9790 h63
LOCATION_MARK:
  lines w1: 3679,-1506 7679,-1506 ; 3929,-1546 3929,-1346 ; 4799,-1546 4799,-1346 ; 5429,-1266 7679,-1266 ; 5679,-1546 5679,-1346 ; 6549,-1346 6549,-1046 ; 6799,-1546 6799,-1346
Mechanical 255:
  lines w1: 835,1185 835,1490 1135,1490 1135,1185 835,1185 ; 2375,130 3100,130 3100,210 2375,210 2375,130 ; 2387,815 2390,815 2410,795 2410,775 2440,745 2560,745 2605,790 2785,790 2810,815 2865,815 2930,815 2945,830 2945,925 2935,935 2865,935 2865,1210 2387,1210 2387,815 ; 2410,1845 2820,1845 2820,1890 2410,1890 2410,1845 ; 2755,1930 2995,1930 2995,2025 2755,2025 2755,1930 ; 2850,905 3000,905 3000,1110 2850,1110 2850,905 ; 3000,1399 3004,1395 3336,1395 3340,1399 3340,1506 3336,1510 3004,1510 3000,1506 3000,1399 ; 3043,1118 3047,1114 3098,1114 3102,1118 3102,1193 3098,1197 3047,1197 3043,1193 3043,1118 ; 3785,1174 3789,1170 4016,1170 4020,1174 4020,1331 4016,1335 3789,1335 3785,1331 3785,1174

## Text inside footprints (layer, text, board x,y; h text height)
C1: PIN_NUMBER "2" at 2280,1180 h10 r90; PIN_NUMBER "1" at 2280,1140 h10 r90; SYMDIM_TOP "0.51" at 2404,970 h25 r90; SYMDIM_TOP "20.00" at 2342,954 h25 r90; SYMDIM_TOP "1.02" at 2221.5,1257.5 h25 r90; SYMDIM_TOP "40.00" at 2159.5,1241.5 h25 r90; SYMDIM_TOP "1.02" at 2401.5,1237.5 h25 r90; SYMDIM_TOP "40.00" at 2339.5,1221.5 h25 r90; SYMDIM_TOP "Pad 1,2 C025S" at 2360.4,1160 h25 r90; SYMDIM_TOP "CC0402_25" at 2000.3,1160 h25 r90
C2: PIN_NUMBER "2" at 2272,1065 h10 r270; PIN_NUMBER "1" at 2272,1105 h10 r270; SYMDIM_TOP "0.51" at 2156,1275 h25 r270; SYMDIM_TOP "20.00" at 2218,1291 h25 r270; SYMDIM_TOP "1.02" at 2338.5,987.5 h25 r270; SYMDIM_TOP "40.00" at 2400.5,1003.5 h25 r270; SYMDIM_TOP "1.02" at 2158.5,1007.5 h25 r270; SYMDIM_TOP "40.00" at 2220.5,1023.5 h25 r270; SYMDIM_TOP "Pad 1,2 C025S" at 1939.6,1085 h25 r270; SYMDIM_TOP "CC0402_25" at 2379.7,1085 h25 r270
C3: PIN_NUMBER "2" at 4086,209 h10 r180; PIN_NUMBER "1" at 4126,209 h10 r180; SYMDIM_TOP "0.51" at 4300,329 h25 r180; SYMDIM_TOP "20.00" at 4316,267 h25 r180; SYMDIM_TOP "1.02" at 4012.5,146.5 h25 r180; SYMDIM_TOP "40.00" at 4028.5,84.5 h25 r180; SYMDIM_TOP "1.02" at 4032.5,326.5 h25 r180; SYMDIM_TOP "40.00" at 4048.5,264.5 h25 r180; SYMDIM_TOP "Pad 1,2 C025S" at 3980,415.4 h25 r180; SYMDIM_TOP "CC0402_25" at 4020,15.3 h25 r180
C4: PIN_NUMBER "2" at 4125,1720 h10 r90; PIN_NUMBER "1" at 4125,1680 h10 r90; SYMDIM_TOP "0.51" at 4249,1510 h25 r90; SYMDIM_TOP "20.00" at 4187,1494 h25 r90; SYMDIM_TOP "1.02" at 4066.5,1797.5 h25 r90; SYMDIM_TOP "40.00" at 4004.5,1781.5 h25 r90; SYMDIM_TOP "1.02" at 4246.5,1777.5 h25 r90; SYMDIM_TOP "40.00" at 4184.5,1761.5 h25 r90; SYMDIM_TOP "Pad 1,2 C025S" at 4205.4,1700 h25 r90; SYMDIM_TOP "CC0402_25" at 3845.3,1700 h25 r90
C5: PIN_NUMBER "2" at 11,1889 h10 r180; PIN_NUMBER "1" at -29,1889 h10 r180; SYMDIM_BOTTOM "0.51" at -195,2009 h25 r180; SYMDIM_BOTTOM "20.00" at -211,1947 h25 r180; SYMDIM_BOTTOM "1.02" at 92.5,1826.5 h25 r180; SYMDIM_BOTTOM "40.00" at 76.5,1764.5 h25 r180; SYMDIM_BOTTOM "1.02" at 72.5,2006.5 h25 r180; SYMDIM_BOTTOM "40.00" at 56.5,1944.5 h25 r180; SYMDIM_BOTTOM "Pad 1,2 C025S" at -135,2095.4 h25 r180; SYMDIM_BOTTOM "CC0402_25" at -95,1695.3 h25 r180